# Altium PCB DRV8825 Printplaat.PcbDoc
Units mil, origin at the board's own origin, x right, y up, seen from the top; angles counter-clockwise.
Board outline 600 x 850 mil, 2 copper layers (Top Layer, Bottom Layer); 13 components, 13 nets, 66 pads, 25 vias.
Unrouted connection lines stored in the file: 17.
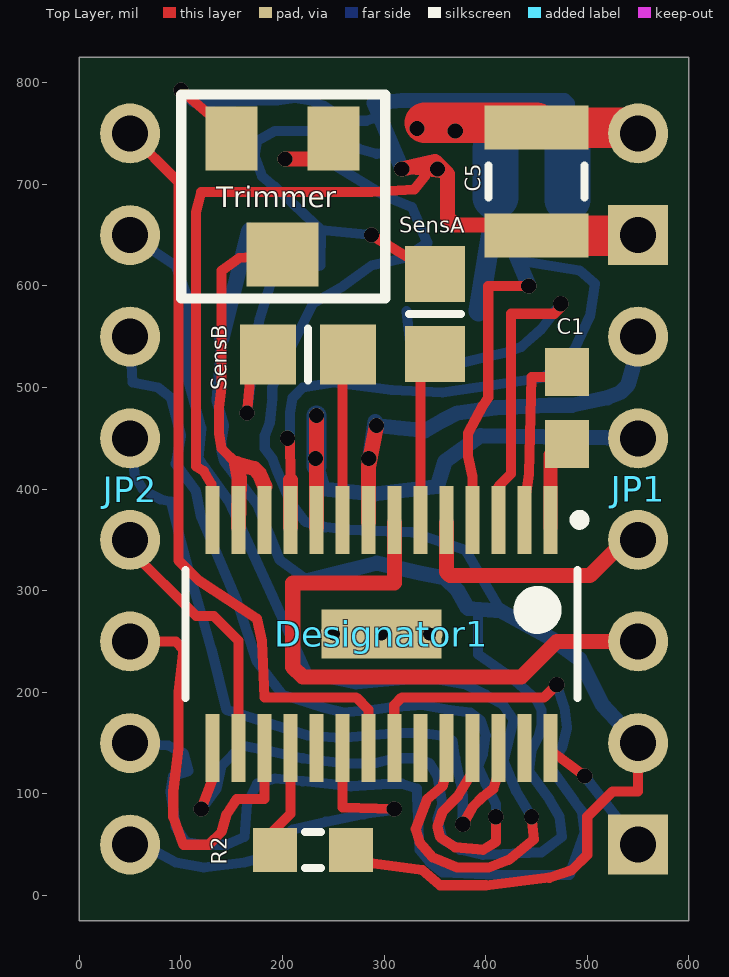
[diagram p0: Top Layer view]
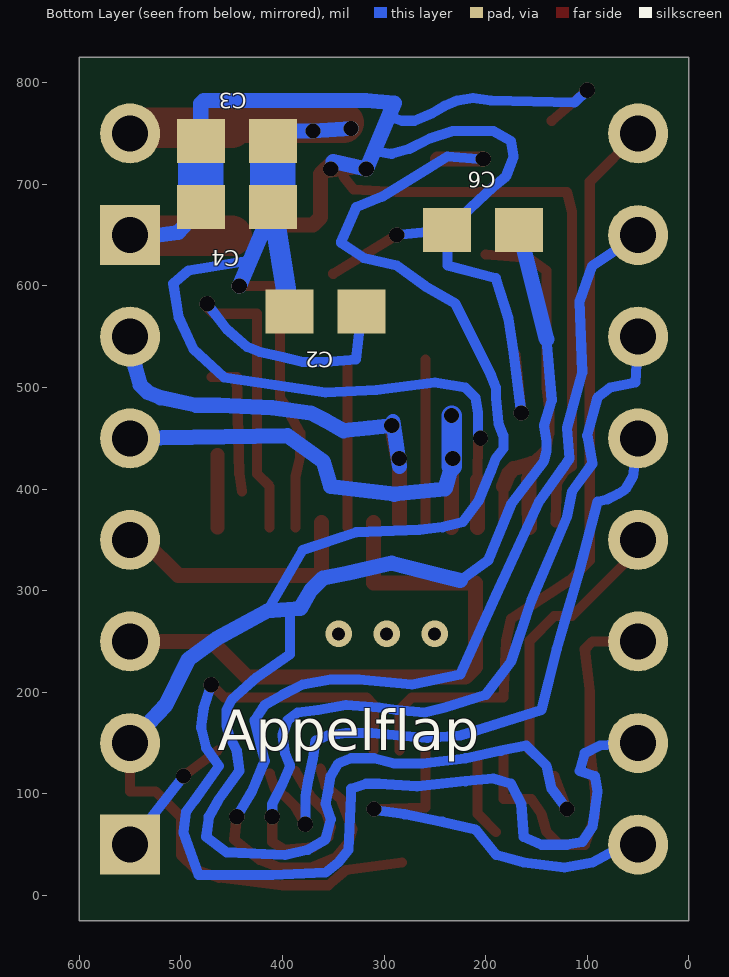
[diagram p1: Bottom Layer view, seen from below]

## Layer stack, top to bottom
Top Layer: signal copper 1.4
Dielectric: core 12.6, FR-4, Dk 4.8
Bottom Layer: signal copper 1.4

## Board outline
0,0 0,-25 600,-25 600,825 0,825

## Design rules (kind name [scope] priority, off if disabled: settings)
Clearance [All] p1: gap=7
HoleSize [All] p1: absolutevalues=TRUE maxlimit=100 minlimit=13 maxpercent=80.000 minpercent=20.000
MinimumAnnularRing [All] p1: minimumring=7
PolygonConnect [All] p1: connectstyle=Relief reliefconductorwidth=10 reliefentries=4 polygonreliefangle="90 Angle"
RoomDefinition "Stepper driver met DVR8825 Pololu compatible" [InComponentClass('Stepper driver met DVR8825 Pololu compatible')] p1: confinementstyle=ConfineIn formatcopy=TRUE lockcomponents=FALSE outline 0,-25 600,-25 600,825 0,825
RoutingVias [All] p1: holewidth=15 width=10 viastyle="Through Hole" minholewidth=15 minwidth=7 maxholewidth=20 maxwidth=15
ShortCircuit [All] p1: allowed=TRUE
SilkscreenOverComponentPads [All] p1: minsilkscreentomaskgap=10
SolderMaskExpansion [All] p1: expansion=4
ViasUnderSMD [All] p1: allowed=TRUE
Width [All] p1: maxlimit=60 minlimit=6 preferedwidth=10
25 further rules are at their usual default settings.

## Classes and differential pairs
component class "Stepper driver met DVR8825 Pololu compatible": C1 C2 C3 C4 C5 C6 JP2 R2 SensA SensB Trimmer

## Components (designator, comment, footprint, x,y, rotation, side; value= is the part's Value field where it differs from the comment)
C1 "Cap" CAPC1608M 480,480 r270 top
C2 "Cap" CAPC1608M 357.5,575 r180 bottom
C3 "Cap" CAPC1608M 445,742.5 r180 bottom
C4 "Cap" CAPC1608M 445,677.5 r180 bottom
C5 "Cap" C1210 450,702.5 r90 top
C6 "Cap" CAPC1608M 202.5,655 r180 bottom
Designator1 "Comment" DRV8825 297.5,257.5 r270 top
JP1 "" "HDR1X8 ZONDER OMLIJNING"#1 550,750 r270 top (schematic designator JP2)
JP2 "eader 8" "HDR1X8 ZONDER OMLIJNING"#2 50,50 r90 top (schematic designator JP1)
R2 "" RESC1608M 230,45 r180 top
SensA "SEN" RESC2012M 350,572.5 r270 top (schematic designator R4)
SensB "SEN" RESC2012M 225,532.5 r0 top (schematic designator R3)
Trimmer "Pot 10k" POT5MM 250,745 r180 top (schematic designator R1)

## Footprints (in the part's own frame and the unit in brackets; to place one, negate y for a bottom-side part, rotate by r counter-clockwise, add the part's x,y. Pads: shape width x height; smd on the part's side, far side on the other; paste and mask are expansions set on the pad)
C1210 [mm] "Chip Capacitor, Body 3.2x2.5mm, IPC High Density"
  rect 1.1x2.6 smd: 1(-1.35,0) 2(1.35,0)
  silkscreen extent -0.4,-1.2 0.4,1.2, body extent -1.7,-1.35 1.7,1.35, height 1.3
CAPC1608M [mm] "Chip Capacitor, Body 1.6x0.8mm, IPC Low Density"
  rect 1.2x1.1 smd: 1(-0.9,0) 2(0.9,0)
  body extent -0.87,-0.48 0.87,0.48, height 0.85
DRV8825 [mm] "TI Stepper Motor Driver, replacement for the Pololu A4988 (mainly) 3D-printer stepper driver modules."
  rect 1.7x0.35 smd: 1(-2.85,4.225) 2(-2.85,3.575) 3(-2.85,2.925) 4(-2.85,2.275) 5(-2.85,1.625) 6(-2.85,0.975) 7(-2.85,0.325) 8(-2.85,-0.325) 9(-2.85,-0.975) 10(-2.85,-1.625) 11(-2.85,-2.275) 12(-2.85,-2.925) 13(-2.85,-3.575) 14(-2.85,-4.225) 15(2.85,-4.225) 16(2.85,-3.575) 17(2.85,-2.925) 18(2.85,-2.275) 19(2.85,-1.625) 20(2.85,-0.975) 21(2.85,-0.325) 22(2.85,0.325) 23(2.85,0.975) 24(2.85,1.625) 25(2.85,2.275) 26(2.85,2.925) 27(2.85,3.575) 28(2.85,4.225)
  rect 1.221x3 smd: 29(0,0)
  silkscreen extent -2.97,-4.9 1.6,5.08, body extent -2.25,-4.9 2.25,4.9, height 1.2
"HDR1X8 ZONDER OMLIJNING"#1 [mm]
  round 1.5 hole 0.9: 1(0,0) 3(5.08,0) 4(7.62,0) 5(10.16,0) 6(12.7,0) 7(15.24,0)
  rect 1.5x1.5 hole 0.9: 2(2.54,0) 8(17.78,0)
"HDR1X8 ZONDER OMLIJNING"#2 [mm]
  round 1.5 hole 0.9: 1(0,0) 2(2.54,0) 3(5.08,0) 4(7.62,0) 5(10.16,0) 6(12.7,0) 7(15.24,0) 8(17.78,0)
POT5MM [mm]
  rect 1.3x1.6 smd: CCW(2.54,0) CW(0,0)
  rect 1.8x1.6 smd: W(1.27,2.9)
  silkscreen extent -1.3,-1.1 3.8,4
RESC1608M [mm] "Chip Resistor, Body 1.6x0.8mm, IPC Low Density"
  rect 1.1x1.1 smd: 1(-0.95,0) 2(0.95,0)
  silkscreen extent -0.2,-0.45 0.2,0.45, body extent -0.85,-0.48 0.85,0.48, height 0.6
RESC2012M [mm] "Chip Resistor, Body 2.0x1.3mm, IPC Low Density"
  rect 1.4x1.5 smd: 1(-1,0) 2(1,0)
  silkscreen extent 0,-0.65 0,0.65, body extent -1.07,-0.7 1.07,0.7, height 0.65

## Part data
C1 C2 C3 C4 C5 C6: library part "Cap Semi", "Capacitor (Semiconductor SIM Model)"
JP1 JP2: library part "Header 8", "Header, 8-Pin"
R2 SensA SensB: library part Res3, "Resistor"
Trimmer: library part "RPot SM", "Square Trimming Potentiometer"

## Via types
v1: diameter 15, hole 15, Top Layer to Bottom Layer, 22 vias
v2: diameter 25.98, hole 12.99, Top Layer to Bottom Layer, tented top, 3 vias

## Nets (pads, with @x,y where several pads share a name; then routed paths per layer and width w, separated by ;. In a path a pad name is that pad's centre, name@x,y a point inside that pad or via, vN(x,y) a via of type N, cw(c..) or ccw(c..) an arc to the next point about the centre after c; other vN are vias at no path point)
3V3: C6.2 JP1.7 Trimmer.CW
GND: C3.1 C4.1 C5.1 C6.1 JP2.2 JP2.8 SensA.1 SensB.1 Trimmer.W
  other v1: 165,475 287.5,650
Net*_16: JP1.4
Net*_17: JP1.3
Net*_18: R2.1
Net*_20: JP1.1
Net*_21: JP1.8
Net*_22: JP1.2
Net*_24: 
Net*_25: JP1.6
Net*_26: JP1.5
NetC2_1: C2.1 C3.2 C4.2 C5.2 JP2.1
NetJP1_7: JP2.7 R2.2
pads on no net: C1.1 C1.2 C2.2 Designator1.1 Designator1.2 Designator1.3 Designator1.4 Designator1.5 Designator1.6 Designator1.7 Designator1.8 Designator1.9 Designator1.10 Designator1.11 Designator1.12 Designator1.13 Designator1.14 Designator1.15 Designator1.16 Designator1.17 Designator1.18 Designator1.19 Designator1.20 Designator1.21 Designator1.22 Designator1.23 Designator1.24 Designator1.25 Designator1.26 Designator1.27 Designator1.28 Designator1.29 JP2.3 JP2.4 JP2.5 JP2.6 SensA.2 SensB.2 Trimmer.CCW
copper on no net: | length 15275
  Top Layer w10: 50,250 95,250 102.5,242.5 97.5,200 97.5,145 92.5,102.5 92.5,77.5 102.5,50 127.5,50 140,62.5 145,80 155,95 182.34,95 182.34,142.8 ; 50,340 115,275 132.5,275 156.75,250.75 156.75,142.8 ; 50,750 97.5,702.5 97.5,330 117.5,310 175,272.5 180,250 182.4,194.9 ; v1(100,792.5) 135,762.5 ; v1(120,85) 132.5,117.5 ; 131.16,367.2 130,405 122.5,417.5 115,422.5 115,492.5 115,622.5 115,672.5 120,692.5 190,692.5 287.5,692.5 330,695 340,707.5 342.5,720 ; 155,425 140,440 137.5,455 137.5,467.5 137.5,480 140,500 140,600 140,615 157.5,627.5 200,630.83 ; 165,475 170.63,532.5 ; 182.34,367.2 182.5,402.5 ; 184.66,195 272.5,195 284.7,182.8 284.7,142.8 ; 190,62.5 207.93,80.43 207.93,137.8 ; v1@207.5,450 207.93,408.91 ; v1@232.5,472.5 v1(233.52,472.5) ; 259.11,142.8 259.11,86.61 v1(310,85) ; 259.11,362.2 259.11,527.24 ; 282.5,32.5 337.5,25 355,10 400,10 462.5,17.5 485,25 500,40 500,77.5 525,102.5 550,102.5 550,150 ; 287.5,650 350,611.87 ; 310.3,142.8 310,187.5 317.5,195 457.5,195 v1(470,207.5) ; v1@320,715.58 362.5,710 ; 335.89,362.2 335.89,525.89 ; 362.5,125 357.5,107.5 342.5,95 331.16,65.52 335,52.5 347.5,37.5 372.5,27.5 402.5,27.5 422.5,35 447.5,55 v1(445,77.5) ; v1(377.5,70) 387.5,87.5 397.5,97.5 407.5,105 412.5,120 ; 387.07,362.2 387.07,412.07 382.5,432.5 382.5,455 397.5,482.5 402.5,490 402.5,600 v1@435,600 ; 387.5,122.5 372.5,97.5 357.5,82.5 352.5,67.5 355,57.5 370,47.5 397.5,45 410,52.5 v1(410,77.5) ; 412.66,362.2 412.66,402.66 425,415 425,572.5 467.5,572.5 v1@475,580 ; 440,397.5 442.5,415 445,510.43 470,510.43 ; 463.84,142.8 v1(497.5,117.5)
  Top Layer w14: 463.84,362.2 463.84,433.41
  Top Layer w15: 156.75,362.2 157.5,410 155,425 172.5,420 177.5,415 182.5,402.5 ; v1(202.5,725) 235,725 247.5,725 ; 207.93,362.2 207.93,408.91 ; 233.52,362.2 v1(233.52,472.5) ; 284.7,367.2 284.7,422.5 v1(292.5,462.5) ; 310.3,307.5 210,307.5 210,245 210,225 220,215 435,215 465,245 470,250 550,250 ; 310.3,307.8 310.3,367.2 ; v1(317.5,715) 350,722.5 362.5,710 362.5,667.5 370,660 412.5,660 ; 361.48,367.2 361.48,318.52 ; 537.5,350 502.5,315 487.5,315 365,315 ; 361.48,318.52 365,315 ; 361.48,318.52 365,315
  Top Layer w40: 340,760.65 450,760.65 ; 450,649.35 549.35,649.35 ; 450,755.65 544.35,755.65
  Bottom Layer w10: 50,50 60,40 ; 50,150 87.5,147.5 102.5,140 107.5,122.5 92.5,117.5 90,102.5 95,67.5 105,52.5 120,50 145,50 162.5,57.5 165,90 175,110 192.5,115 220,112.5 267.5,107.5 305,110 317.5,110 332.5,105 332.5,97.5 335,45 345,32.5 357.5,22.5 410,20 482.5,20 497.5,62.5 495,82.5 487.5,92.5 462.5,127.5 475,145 480,165 477.5,185 v1(470,207.5) ; 50,450 55,412.5 62.5,400 70,395 80,390 90.08,387.52 107.5,320 120,277.5 130,242.5 145,182.5 225,157.5 257.5,155 285,157.5 312.5,160 337.5,160 355,157.5 367.5,152.5 370,135 375,112.5 377.5,97.5 v1(377.5,70) ; 50,550 52.5,505 77.5,500 90,490 100,452.5 95,425 115,397.5 120,372.5 155,290 175,230 200,197.5 240,185 260,180 287.5,182.5 305,185 337.5,187.5 365,182.5 385,180 395,172.5 400,157.5 397.5,140 392.5,127.5 400,110 410,90 v1(410,77.5) ; 50,650 95,620 107.5,585 105,515 120,460 117.5,430 122.5,422.5 147.5,387.5 190,295 225,217.5 272.5,207.5 325,212.5 352.5,212.5 380,207.5 400,197.5 417.5,187.5 427.5,172.5 422.5,152.5 417.5,132.5 430,102.5 v1(445,77.5) ; 62.5,50 95,32.5 122.5,27.5 162.5,32.5 190,40 210,65 242.5,72.5 280,80 v1@310.1,84.3 ; v1(100,792.5) 112.75,780.39 195,782.5 212.5,785 227.5,782.5 240,777.5 252.5,770 270,762.5 282.5,762.5 290,765 ; v1(120,85) 135,105 140,127.5 160,147.5 185,142.5 220,135 262.5,130 290,130 310,135 332.5,135 345,130 352.5,117.5 355,102.5 357.5,90 352.5,75 357.5,55 375,45 397.5,40 455,42.5 475,57.5 472.5,77.5 462.5,95 442.5,122.5 445,142.5 452.5,157.5 455,167.5 455,182.5 450,192.5 425,215 392.5,237.5 392.5,275 ; 140,547.5 135,487.5 142.5,462.5 140,447.5 140,437.5 142.5,427.5 175,385 197.5,330 225,310 ; 165,475 172.5,535 177.5,567.5 190,607.5 237.5,620 237.93,655 ; v1@207.5,450 207.5,467.5 207.5,475 210,490 220,500 250,505 307.5,497.5 357.5,495 407.5,502.5 457.5,510 487.5,537.5 502.5,570 507.5,602.5 492.5,615 431.88,625 ; v1@207.5,725 237.5,727.5 257.5,715 302.5,687.5 327.5,677.5 342.5,642.5 320,627.5 287.5,620 260,600 230,582.5 195,512.5 190,500 190,490 187.5,465 182.5,452.5 182.5,440 190,430 195,417.5 207.5,387.5 222.5,367.5 242.5,362.5 265,360 327.5,357.5 380,340 415,280 ; 287.5,650 237.93,655 ; 310,732.73 292.5,730 275,735 255,745 232.5,752.5 210,752.5 192.5,752.5 175,742.5 172.5,727.5 180,707.5 192.5,697.5 237.93,655 ; 322.07,575 327.5,527.5 357.5,525 380,525 400,530 422.5,535 435,540 455,557.5 v1(473.98,582.5) ; 477.5,782.5 480.43,779.57 ; v1(497.5,117.5) 550,50 ; 545,520 550,540 550,550 ; v1(317.5,715) 350,722.5 v1(317.5,715)
  Bottom Layer w15: 140,547.5 167.07,655 ; 225,310 245,315 292.5,327.1 335,317.5 360,312.5 372.5,300 382.5,282.39 415,280 465,252.5 492.5,232.5 515,187.5 550,150 ; 233.52,422.5 240,400 290,395 352.5,402.5 360,427.5 395,452.5 550,450 ; 284.7,422.5 v1@291.31,466.17 ; v1(292.5,462.5) 315,460 340,457.5 357.5,467.5 372.5,475 410,480 462.5,482.5 485,482.5 520,490 532.5,495 540,502.5 545,520 ; v1(332.5,755) v1(370,752.5) 395,752.5 ; 350,722.5 v1(317.5,715) 290,780 317.5,782.5 355,782.5 477.5,782.5 ; 409.57,677.5 v1(442.5,600) ; 480.43,677.5 502.5,652.5 540,647.5 ; 480.43,742.5 480.43,779.57
  Bottom Layer w20: 233.52,422.5 v1(233.52,472.5) ; 392.93,575 409.57,677.5
  Bottom Layer w45: 409.57,687.5 409.57,735 ; 480.43,685 480.43,742.5
  other v1: 232.5,430 285,430 205,450 352.5,715
  other v2: 250.26,257.5 297.5,257.5 344.74,257.5

## Silkscreen, mask and mechanical layers (free items; w line width, h text height)
Bottom Overlay:
  text "Appelflap" at 463.84,142.8 h40
Bottom Solder:
  rectangle: 232.5,240 362.5,275